# EAGLE board Multinutzen (EAGLE 4.16)
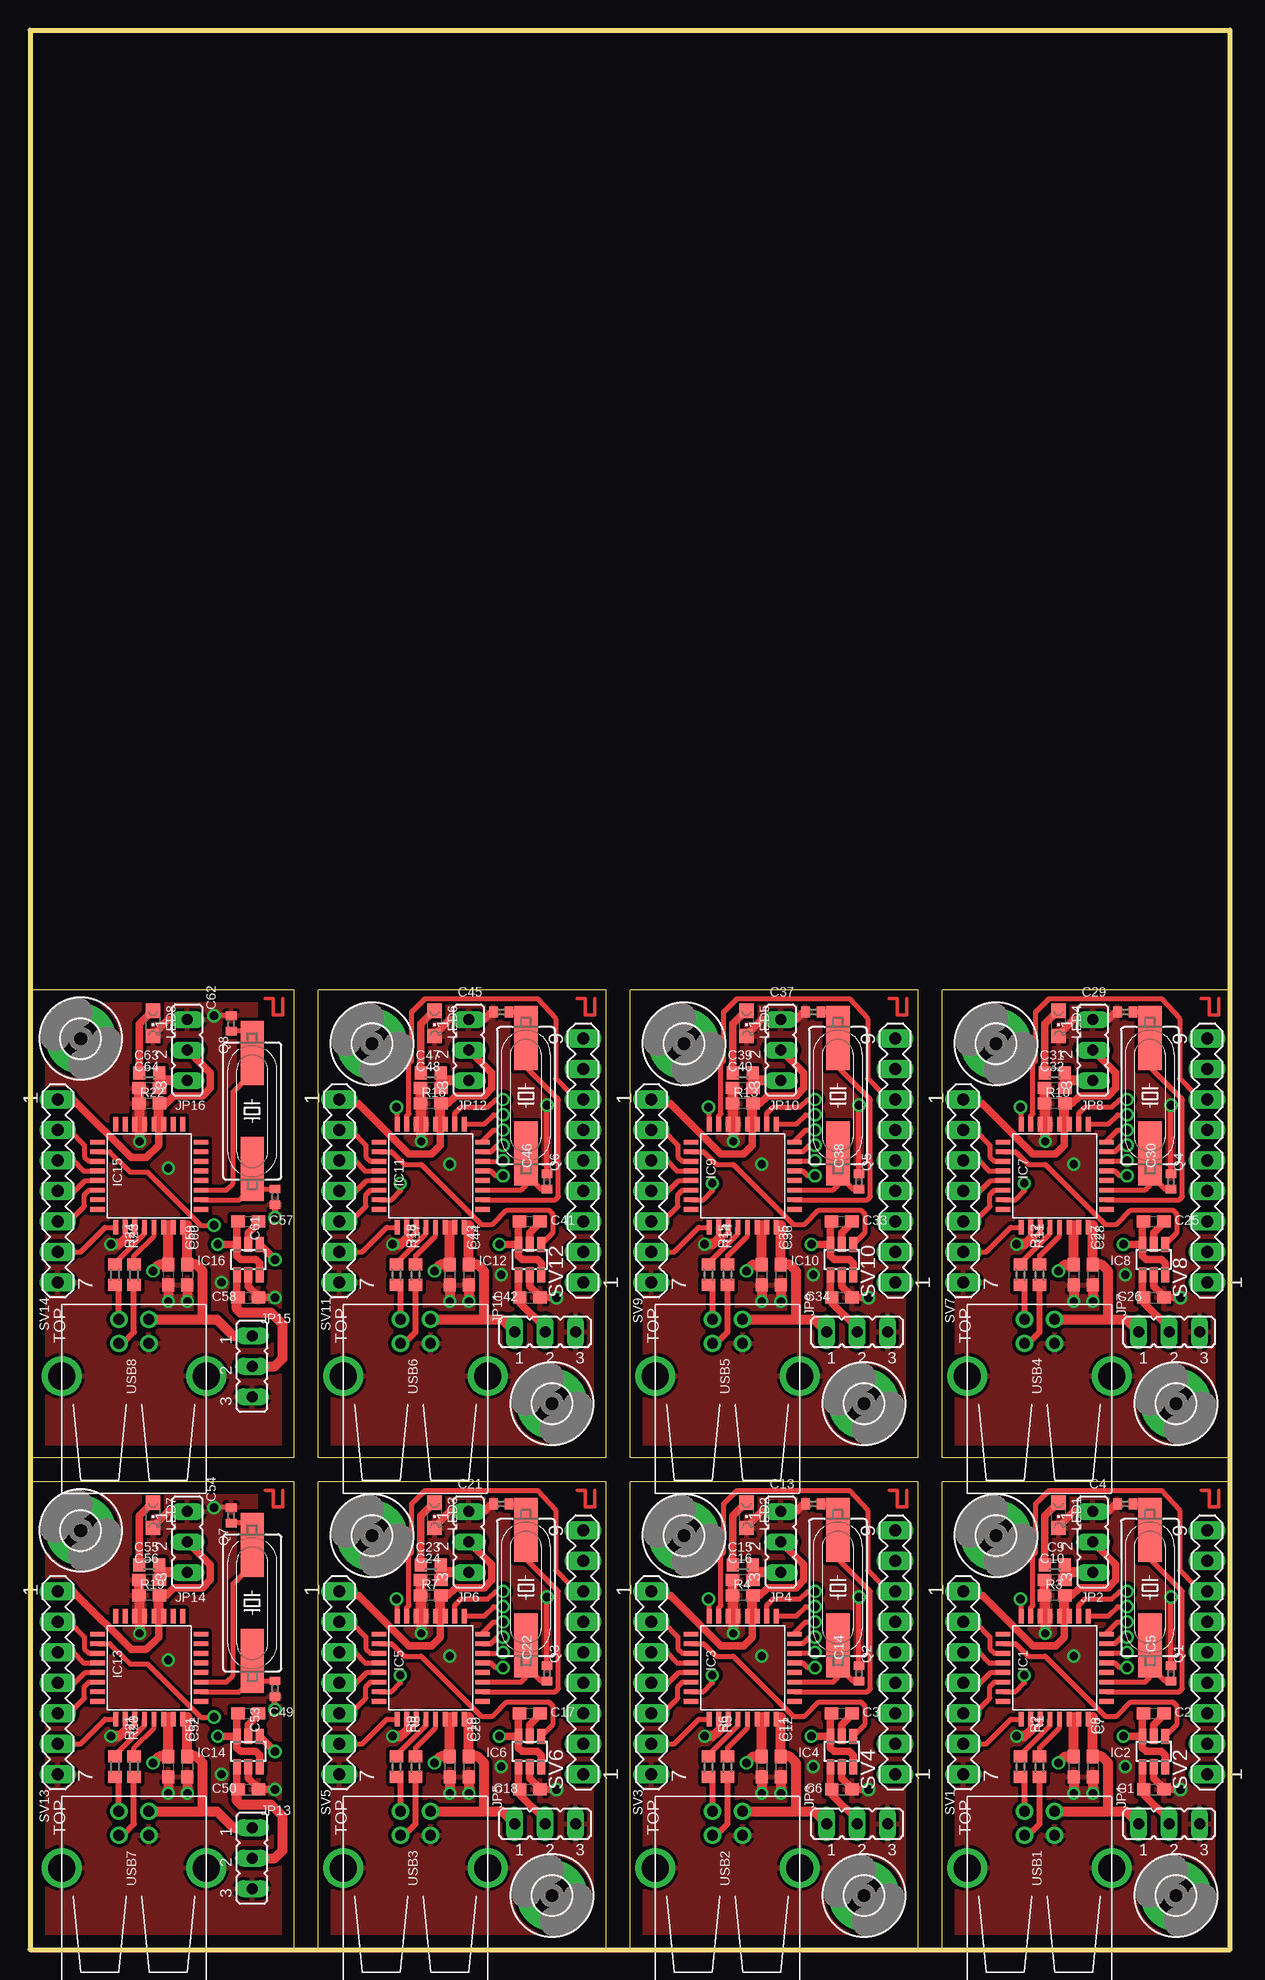
[diagram p0: board, top side]
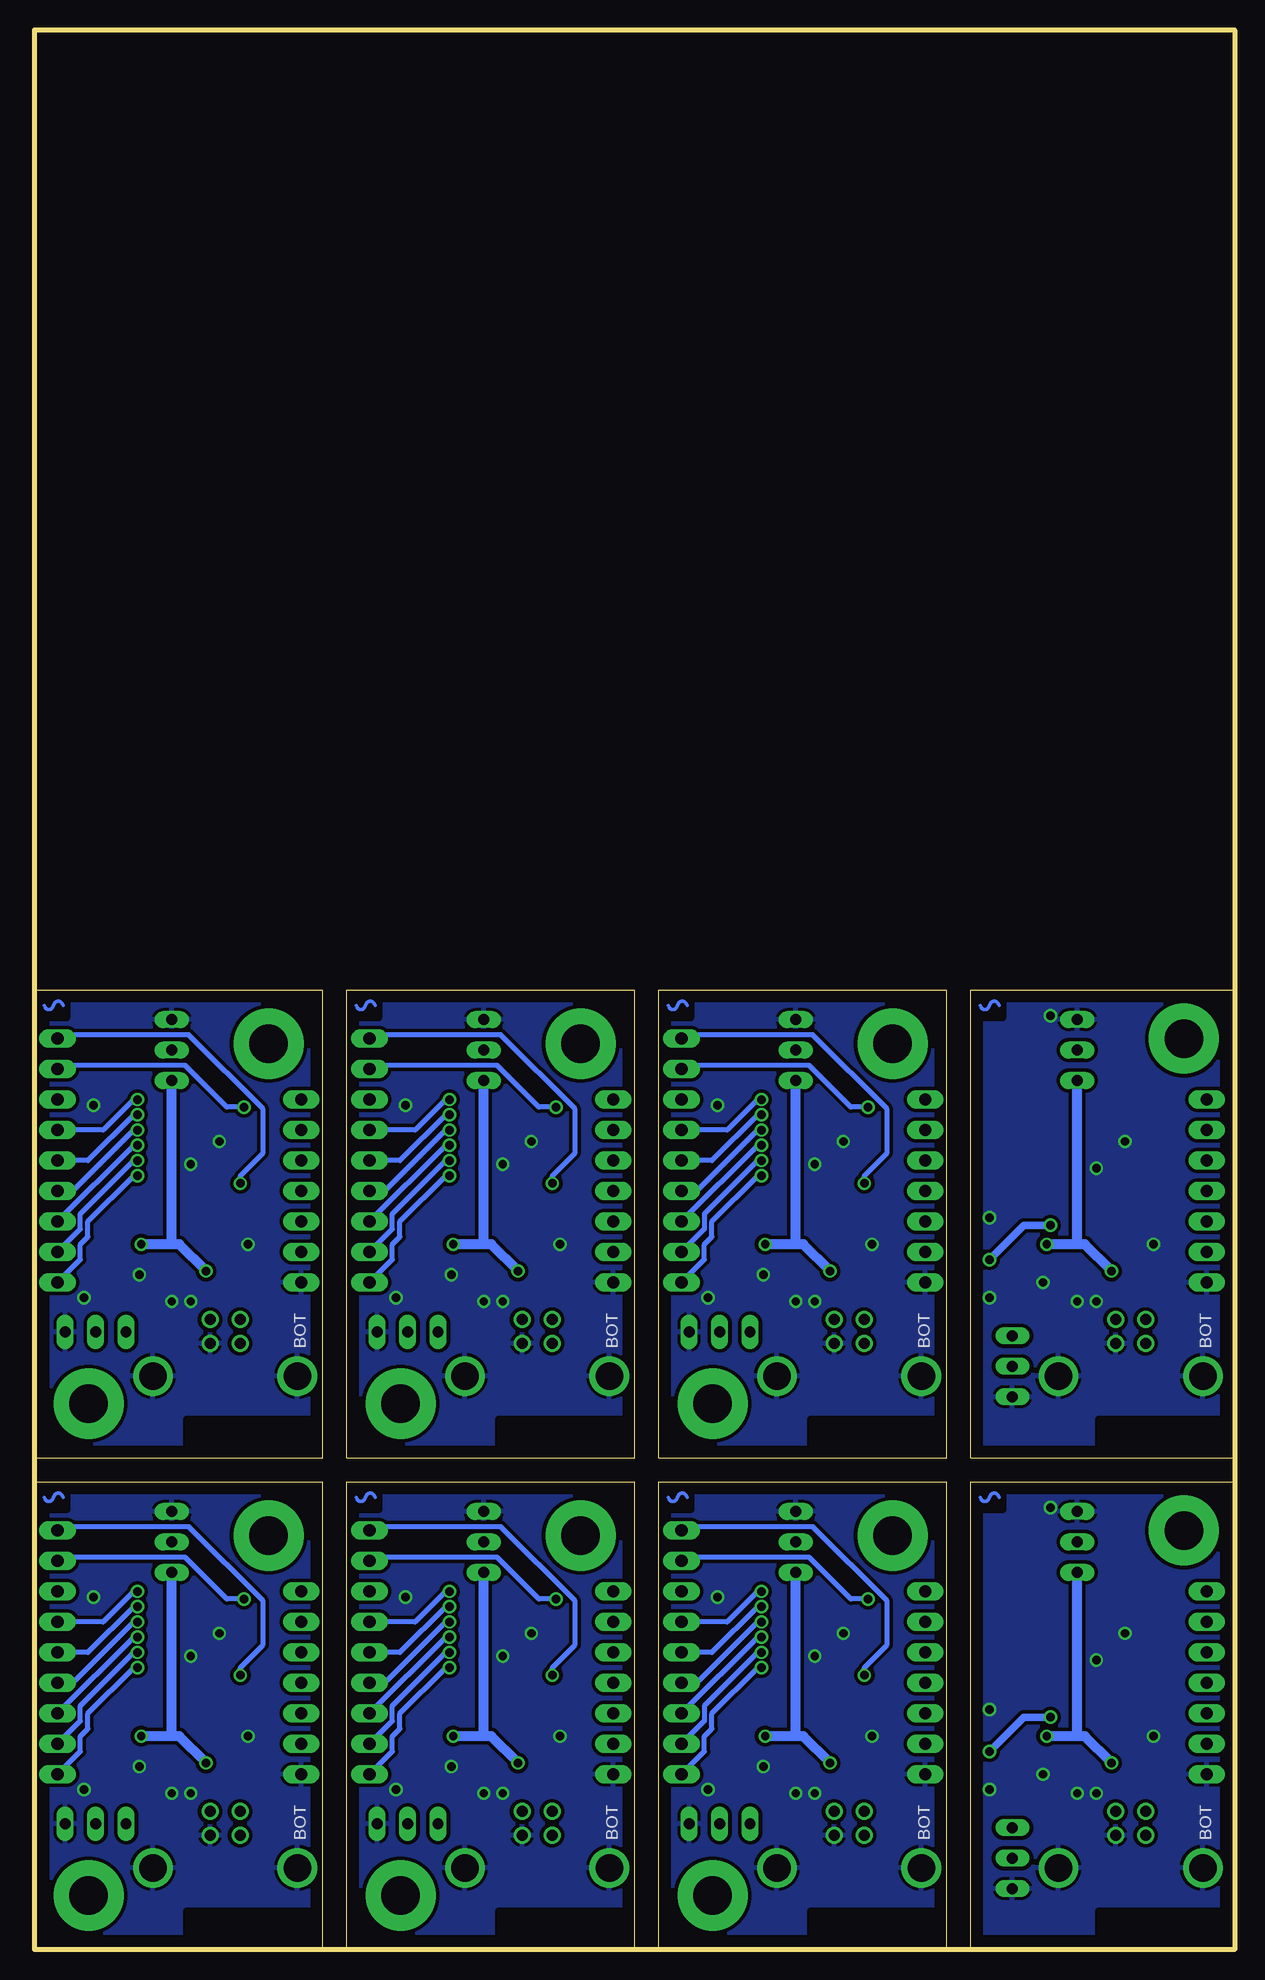
[diagram p1: board, bottom side, seen from below]

Size 100 x 160 mm. Coordinates in mm from the lower left corner, seen from the top.
Outline: 100,0 0,0 0,160 100,160 100,0
Outline: 100,0 100,39 76,39 76,0 100,0
Outline: 74,0 74,39 50,39 50,0 74,0
Outline: 48,0 48,39 24,39 24,0 48,0
Outline: 100,41 100,80 76,80 76,41 100,41
Outline: 74,41 74,80 50,80 50,41 74,41
Outline: 48,41 48,80 24,80 24,41 48,41
Outline: 22,0 22,39 0.04,39 0.04,0 22,0
Outline: 22,41 22,80 0.04,80 0.04,41 22,41
Copper layers (1*16): Top 0.035mm / dielectric 1.5mm / Bottom 0.035mm
Design rules "default": minimum track width 10mil, minimum drill 24mil, track to track 8mil, track to pad 8mil, pad to pad 8mil, via to via 8mil, smd to smd 8mil, copper to edge 40mil, drill to drill 8mil, minimum pad ring 10mil, minimum via ring 8mil, stop-mask expansion 4mil, vias tented up to drill 0mil, thermal gap 10mil
Net classes: 1 power: width 0.61 mm
tRestrict: area 97.3,36.7 to 99.5,38.7; area 71.3,36.7 to 73.5,38.7; area 45.3,36.7 to 47.5,38.7; area 97.3,77.7 to 99.5,79.7; area 71.3,77.7 to 73.5,79.7; area 45.3,77.7 to 47.5,79.7; area 19.3,36.7 to 21.5,38.7; area 19.3,77.7 to 21.5,79.7
bRestrict: area 86.5,2.7 to 86.8,2.8; area 85,2.7 to 86,2.8; area 86.5,2.7 to 86.8,2.7; area 85,2.7 to 86,2.7; area 86.5,2.6 to 86.8,2.7; area 85,2.6 to 86,2.7; area 86.5,2.6 to 86.8,2.6; area 85,2.6 to 86,2.6; area 86.5,2.6 to 86.8,2.6; area 85,2.6 to 86,2.6; area 86.5,2.5 to 86.8,2.6; area 85,2.5 to 86,2.6; 796 more areas
Milling: 32 lines

## Footprints (pad centres in the part's own frame; a part is rotated, then mirrored left to right if it is on the bottom)
C0603 = smd 1.1 x 1: 1 -0.85,0; 2 0.85,0
C0402 = smd 0.7 x 0.9: 1 -0.65,0; 2 0.65,0
3,2-PAD = drill 3.2 pad 5.842 round: B3,2 0,0
LQFP32 = smd 0.4 x 1.2: 1 -2.8,-4.3; 2 -2,-4.3; 3 -1.2,-4.3; 4 -0.4,-4.3; 5 0.4,-4.3; 6 1.2,-4.3; 7 2,-4.3; 8 2.8,-4.3; 17 2.8,4.3; 18 2,4.3; 19 1.2,4.3; 20 0.4,4.3; 21 -0.4,4.3; 22 -1.2,4.3; 23 -2,4.3; 24 -2.8,4.3 | smd 1.2 x 0.4: 9 4.3,-2.8; 10 4.3,-2; 11 4.3,-1.2; 12 4.3,-0.4; 13 4.3,0.4; 14 4.3,1.2; 15 4.3,2; 16 4.3,2.8; 25 -4.3,2.8; 26 -4.3,2; 27 -4.3,1.2; 28 -4.3,0.4; 29 -4.3,-0.4; 30 -4.3,-1.2; 31 -4.3,-2; 32 -4.3,-2.8
SOT23-6 = smd 0.635 x 1.27: P$1 -0.953,-1.27; P$2 0,-1.27; P$3 0.953,-1.27; P$4 0.953,1.27; P$5 0,1.27; P$6 -0.953,1.27
JP2 = drill 0.914 long: 1 -2.54,0; 2 0,0; 3 2.54,0
CHIPLED_0805 = smd 1.2 x 1.2: A 0,-1.05; C 0,1.05
HC49UP = smd 5.334 x 1.93: 1 -4.826,0; 2 4.826,0
R0603 = smd 1 x 1.1: 1 -0.85,0; 2 0.85,0
MA07-1 = drill 1.016 long: 1 -7.62,0; 2 -5.08,0; 3 -2.54,0; 4 0,0; 5 2.54,0; 6 5.08,0; 7 7.62,0
MA09-1 = drill 1.016 long: 1 -10.16,0; 2 -7.62,0; 3 -5.08,0; 4 -2.54,0; 5 0,0; 6 2.54,0; 7 5.08,0; 8 7.62,0; 9 10.16,0
USB-B-H = drill 0.914 round: D+ 0,1.25; D- 1.981,1.25; GND 0,-1.25; VBUS 1.981,-1.25 | drill 2.286 round: GND@1 -2.718,6.02; GND@2 -2.718,-6.02

## Placement (x,y rotation side)
C1  2,2µ  [C0603]  93.65,13.34 0 top
C2  1µ  [C0603]  93.65,19.68 0 top
C3  1µ  [C0603]  67.65,19.68 0 top
C4  18p  [C0402]  91.27,37.15 180 top
C5  18p  [C0402]  95.08,23.02 90 top
C6  2,2µ  [C0603]  67.65,13.34 0 top
C7  2,2µ  [C0603]  88.57,15.24 270 top
C8  1µ  [C0603]  86.98,15.24 270 top
C9  2,2µ  [C0603]  85.39,30.8 180 top
C10  1µ  [C0603]  85.39,29.53 180 top
C11  1µ  [C0603]  60.98,15.24 270 top
C12  2,2µ  [C0603]  62.57,15.24 270 top
C13  18p  [C0402]  65.27,37.15 180 top
C14  18p  [C0402]  69.08,23.02 90 top
C15  2,2µ  [C0603]  59.4,30.8 180 top
C16  1µ  [C0603]  59.4,29.53 180 top
C17  1µ  [C0603]  41.65,19.68 0 top
C18  2,2µ  [C0603]  41.65,13.34 0 top
C19  1µ  [C0603]  34.98,15.24 270 top
C20  2,2µ  [C0603]  36.57,15.24 270 top
C21  18p  [C0402]  39.27,37.15 180 top
C22  18p  [C0402]  43.08,23.02 90 top
C23  2,2µ  [C0603]  33.4,30.8 180 top
C24  1µ  [C0603]  33.4,29.53 180 top
C25  1µ  [C0603]  93.65,60.69 0 top
C26  2,2µ  [C0603]  93.65,54.34 0 top
C27  1µ  [C0603]  86.98,56.24 270 top
C28  2,2µ  [C0603]  88.57,56.24 270 top
C29  18p  [C0402]  91.27,78.15 180 top
C30  18p  [C0402]  95.08,64.02 90 top
C31  2,2µ  [C0603]  85.39,71.8 180 top
C32  1µ  [C0603]  85.39,70.53 180 top
C33  1µ  [C0603]  67.65,60.69 0 top
C34  2,2µ  [C0603]  67.65,54.34 0 top
C35  1µ  [C0603]  60.98,56.24 270 top
C36  2,2µ  [C0603]  62.57,56.24 270 top
C37  18p  [C0402]  65.27,78.15 180 top
C38  18p  [C0402]  69.08,64.02 90 top
C39  2,2µ  [C0603]  59.4,71.8 180 top
C40  1µ  [C0603]  59.4,70.53 180 top
C41  1µ  [C0603]  41.65,60.69 0 top
C42  2,2µ  [C0603]  41.65,54.34 0 top
C43  1µ  [C0603]  34.98,56.24 270 top
C44  2,2µ  [C0603]  36.57,56.24 270 top
C45  18p  [C0402]  39.27,78.15 180 top
C46  18p  [C0402]  43.08,64.02 90 top
C47  2,2µ  [C0603]  33.4,71.8 180 top
C48  1µ  [C0603]  33.4,70.53 180 top
C49  1µ  [C0603]  18.19,19.68 0 top
C50  2,2µ  [C0603]  18.19,13.34 0 top
C51  1µ  [C0603]  11.52,15.24 270 top
C52  2,2µ  [C0603]  13.11,15.24 270 top
C53  18p  [C0402]  20.41,21.75 270 top
C54  18p  [C0402]  16.76,36.19 90 top
C55  2,2µ  [C0603]  9.94,30.8 180 top
C56  1µ  [C0603]  9.94,29.53 180 top
C57  1µ  [C0603]  18.19,60.69 0 top
C58  2,2µ  [C0603]  18.19,54.34 0 top
C59  1µ  [C0603]  11.52,56.24 270 top
C60  2,2µ  [C0603]  13.11,56.24 270 top
C61  18p  [C0402]  20.41,62.75 270 top
C62  18p  [C0402]  16.76,77.19 90 top
C63  2,2µ  [C0603]  9.94,71.8 180 top
C64  1µ  [C0603]  9.94,70.53 180 top
H1  MOUNT-PAD-ROUND3.2  [3,2-PAD]  95.5,4.5 90 top
H2  MOUNT-PAD-ROUND3.2  [3,2-PAD]  80.5,34.5 90 top
H3  MOUNT-PAD-ROUND3.2  [3,2-PAD]  69.5,4.5 90 top
H4  MOUNT-PAD-ROUND3.2  [3,2-PAD]  54.5,34.5 90 top
H5  MOUNT-PAD-ROUND3.2  [3,2-PAD]  43.5,4.5 90 top
H6  MOUNT-PAD-ROUND3.2  [3,2-PAD]  28.5,34.5 90 top
H7  MOUNT-PAD-ROUND3.2  [3,2-PAD]  95.5,45.5 90 top
H8  MOUNT-PAD-ROUND3.2  [3,2-PAD]  80.5,75.5 90 top
H9  MOUNT-PAD-ROUND3.2  [3,2-PAD]  69.5,45.5 90 top
H10  MOUNT-PAD-ROUND3.2  [3,2-PAD]  54.5,75.5 90 top
H11  MOUNT-PAD-ROUND3.2  [3,2-PAD]  43.5,45.5 90 top
H12  MOUNT-PAD-ROUND3.2  [3,2-PAD]  28.5,75.5 90 top
H13  MOUNT-PAD-ROUND3.2  [3,2-PAD]  4.22,34.92 90 top
H14  MOUNT-PAD-ROUND3.2  [3,2-PAD]  4.22,75.92 90 top
IC1  MAX3420E  [LQFP32]  85.39,23.5 180 top
IC2  MAX6349  [SOT23-6]  93.65,16.51 0 top
IC3  MAX3420E  [LQFP32]  59.4,23.5 180 top
IC4  MAX6349  [SOT23-6]  67.65,16.51 0 top
IC5  MAX3420E  [LQFP32]  33.4,23.5 180 top
IC6  MAX6349  [SOT23-6]  41.65,16.51 0 top
IC7  MAX3420E  [LQFP32]  85.39,64.5 180 top
IC8  MAX6349  [SOT23-6]  93.65,57.51 0 top
IC9  MAX3420E  [LQFP32]  59.4,64.5 180 top
IC10  MAX6349  [SOT23-6]  67.65,57.51 0 top
IC11  MAX3420E  [LQFP32]  33.4,64.5 180 top
IC12  MAX6349  [SOT23-6]  41.65,57.51 0 top
IC13  MAX3420E  [LQFP32]  9.94,23.5 180 top
IC14  MAX6349  [SOT23-6]  18.19,16.51 0 top
IC15  MAX3420E  [LQFP32]  9.94,64.5 180 top
IC16  MAX6349  [SOT23-6]  18.19,57.51 0 top
JP1  [JP2]  94.92,10.48 0 top
JP2  [JP2]  88.57,33.97 270 top
JP3  [JP2]  68.92,10.48 0 top
JP4  [JP2]  62.57,33.97 270 top
JP5  [JP2]  42.92,10.48 0 top
JP6  [JP2]  36.57,33.97 270 top
JP7  [JP2]  94.92,51.48 0 top
JP8  [JP2]  88.57,74.97 270 top
JP9  [JP2]  68.92,51.48 0 top
JP10  [JP2]  62.57,74.97 270 top
JP11  [JP2]  42.92,51.48 0 top
JP12  [JP2]  36.57,74.97 270 top
JP13  [JP2]  18.51,7.62 270 top
JP14  [JP2]  13.11,33.97 270 top
JP15  [JP2]  18.51,48.62 270 top
JP16  [JP2]  13.11,74.97 270 top
LED1  [CHIPLED_0805]  85.71,36.2 180 top
LED2  [CHIPLED_0805]  59.71,36.2 180 top
LED3  [CHIPLED_0805]  33.71,36.2 180 top
LED4  [CHIPLED_0805]  85.71,77.19 180 top
LED5  [CHIPLED_0805]  59.71,77.19 180 top
LED6  [CHIPLED_0805]  33.71,77.19 180 top
LED7  [CHIPLED_0805]  10.25,36.2 180 top
LED8  [CHIPLED_0805]  10.25,77.19 180 top
Q1  12MHz  [HC49UP]  93.33,30.16 90 top
Q2  12MHz  [HC49UP]  67.33,30.16 90 top
Q3  12MHz  [HC49UP]  41.33,30.16 90 top
Q4  12MHz  [HC49UP]  93.33,71.16 90 top
Q5  12MHz  [HC49UP]  67.33,71.16 90 top
Q6  12MHz  [HC49UP]  41.33,71.16 90 top
Q7  12MHz  [HC49UP]  18.51,28.89 270 top
Q8  12MHz  [HC49UP]  18.51,69.89 270 top
R1  33,2 1%  [R0603]  84.12,15.24 90 top
R2  33,2 1%  [R0603]  82.54,15.24 90 top
R3  150  [R0603]  85.39,32.07 0 top
R4  150  [R0603]  59.4,32.07 0 top
R5  33,2 1%  [R0603]  58.12,15.24 90 top
R6  33,2 1%  [R0603]  56.54,15.24 90 top
R7  150  [R0603]  33.4,32.07 0 top
R8  33,2 1%  [R0603]  32.12,15.24 90 top
R9  33,2 1%  [R0603]  30.54,15.24 90 top
R10  150  [R0603]  85.39,73.07 0 top
R11  33,2 1%  [R0603]  84.12,56.24 90 top
R12  33,2 1%  [R0603]  82.54,56.24 90 top
R13  150  [R0603]  59.4,73.07 0 top
R14  33,2 1%  [R0603]  58.12,56.24 90 top
R15  33,2 1%  [R0603]  56.54,56.24 90 top
R16  150  [R0603]  33.4,73.07 0 top
R17  33,2 1%  [R0603]  32.12,56.24 90 top
R18  33,2 1%  [R0603]  30.54,56.24 90 top
R19  150  [R0603]  9.94,32.07 0 top
R20  33,2 1%  [R0603]  8.66,15.24 90 top
R21  33,2 1%  [R0603]  7.08,15.24 90 top
R22  150  [R0603]  9.94,73.07 0 top
R23  33,2 1%  [R0603]  8.66,56.24 90 top
R24  33,2 1%  [R0603]  7.08,56.24 90 top
SV1  [MA07-1]  77.78,22.23 270 top
SV2  [MA09-1]  98.09,24.77 90 top
SV3  [MA07-1]  51.77,22.23 270 top
SV4  [MA09-1]  72.09,24.77 90 top
SV5  [MA07-1]  25.77,22.23 270 top
SV6  [MA09-1]  46.09,24.77 90 top
SV7  [MA07-1]  77.78,63.23 270 top
SV8  [MA09-1]  98.09,65.77 90 top
SV9  [MA07-1]  51.77,63.23 270 top
SV10  [MA09-1]  72.09,65.77 90 top
SV11  [MA07-1]  25.77,63.23 270 top
SV12  [MA09-1]  46.09,65.77 90 top
SV13  [MA07-1]  2.31,22.23 270 top
SV14  [MA07-1]  2.31,63.23 270 top
USB1  USB-B-H  [USB-B-H]  84.12,9.53 90 top
USB2  USB-B-H  [USB-B-H]  58.12,9.53 90 top
USB3  USB-B-H  [USB-B-H]  32.12,9.53 90 top
USB4  USB-B-H  [USB-B-H]  84.12,50.52 90 top
USB5  USB-B-H  [USB-B-H]  58.12,50.52 90 top
USB6  USB-B-H  [USB-B-H]  32.12,50.52 90 top
USB7  USB-B-H  [USB-B-H]  8.66,9.53 90 top
USB8  USB-B-H  [USB-B-H]  8.66,50.52 90 top

## Library data of the parts
C1-C64 R1-R24 = rcl
H1-H14 = holes
IC1-IC16 = MAXIM
JP1-JP16 = jumper
LED1-LED8 = led
Q1-Q8 = crystal
SV1-SV14 = con-lstb
USB1-USB8 = con-usb-2

## Nets
+3V1: C3.1 C11.1 C15.1 IC3.22 IC3.23 IC4.P$3 IC4.P$6 JP4.3 R4.2
+3V2: C17.1 C19.1 C23.1 IC5.22 IC5.23 IC6.P$3 IC6.P$6 JP6.3 R7.2
+3V3: C2.1 C8.1 C9.1 IC1.22 IC1.23 IC2.P$3 IC2.P$6 JP2.3 R3.2
+3V4: C25.1 C27.1 C31.1 IC7.22 IC7.23 IC8.P$3 IC8.P$6 JP8.3 R10.2
+3V5: C33.1 C35.1 C39.1 IC9.22 IC9.23 IC10.P$3 IC10.P$6 JP10.3 R13.2
+3V6: C41.1 C43.1 C47.1 IC11.22 IC11.23 IC12.P$3 IC12.P$6 JP12.3 R16.2
+3V7: C49.1 C51.1 C55.1 IC13.22 IC13.23 IC14.P$3 IC14.P$6 JP14.3 R19.2
+3V8: C57.1 C59.1 C63.1 IC15.22 IC15.23 IC16.P$3 IC16.P$6 JP16.3 R22.2
/CS: IC1.12 SV1.3
/CS1: IC3.12 SV3.3
/CS2: IC5.12 SV5.3
/CS3: IC7.12 SV7.3
/CS4: IC9.12 SV9.3
/CS5: IC11.12 SV11.3
/CS6: IC13.12 SV13.3
/CS7: IC15.12 SV14.3
/RES: IC1.10 IC2.P$4
/RES1: IC3.10 IC4.P$4
/RES2: IC5.10 IC6.P$4
/RES3: IC7.10 IC8.P$4
/RES4: IC9.10 IC10.P$4
/RES5: IC11.10 IC12.P$4
/RES6: IC13.10 IC14.P$4
/RES7: IC15.10 IC16.P$4
GND: C1.2 C4.2 C5.2 C7.2 C8.2 C9.2 C10.2 IC1.5 IC1.6 IC1.18 IC1.19 IC2.P$2 JP1.3 JP2.1 LED1.C SV1.7 USB1.GND USB1.GND@1 USB1.GND@2
GND1: C6.2 C11.2 C12.2 C13.2 C14.2 C15.2 C16.2 IC3.5 IC3.6 IC3.18 IC3.19 IC4.P$2 JP3.3 JP4.1 LED2.C SV3.7 USB2.GND USB2.GND@1 USB2.GND@2
GND2: C18.2 C19.2 C20.2 C21.2 C22.2 C23.2 C24.2 IC5.5 IC5.6 IC5.18 IC5.19 IC6.P$2 JP5.3 JP6.1 LED3.C SV5.7 USB3.GND USB3.GND@1 USB3.GND@2
GND3: C26.2 C27.2 C28.2 C29.2 C30.2 C31.2 C32.2 IC7.5 IC7.6 IC7.18 IC7.19 IC8.P$2 JP7.3 JP8.1 LED4.C SV7.7 USB4.GND USB4.GND@1 USB4.GND@2
GND4: C34.2 C35.2 C36.2 C37.2 C38.2 C39.2 C40.2 IC9.5 IC9.6 IC9.18 IC9.19 IC10.P$2 JP9.3 JP10.1 LED5.C SV9.7 USB5.GND USB5.GND@1 USB5.GND@2
GND5: C42.2 C43.2 C44.2 C45.2 C46.2 C47.2 C48.2 IC11.5 IC11.6 IC11.18 IC11.19 IC12.P$2 JP11.3 JP12.1 LED6.C SV11.7 USB6.GND USB6.GND@1 USB6.GND@2
GND6: C50.2 C51.2 C52.2 C53.2 C54.2 C55.2 C56.2 IC13.5 IC13.6 IC13.18 IC13.19 IC14.P$2 JP13.3 JP14.1 LED7.C SV13.7 USB7.GND USB7.GND@1 USB7.GND@2
GND7: C58.2 C59.2 C60.2 C61.2 C62.2 C63.2 C64.2 IC15.5 IC15.6 IC15.18 IC15.19 IC16.P$2 JP15.3 JP16.1 LED8.C SV14.7 USB8.GND USB8.GND@1 USB8.GND@2
GPI0: IC1.29 SV2.1
GPI1: IC1.30 SV2.2
GPI2: IC1.31 SV2.3
GPI3: IC1.32 SV2.4
GPI4: IC3.29 SV4.1
GPI5: IC3.30 SV4.2
GPI6: IC3.31 SV4.3
GPI7: IC3.32 SV4.4
GPI8: IC5.29 SV6.1
GPI9: IC5.30 SV6.2
GPI10: IC5.31 SV6.3
GPI11: IC5.32 SV6.4
GPI12: IC7.29 SV8.1
GPI13: IC7.30 SV8.2
GPI14: IC7.31 SV8.3
GPI15: IC7.32 SV8.4
GPI16: IC9.29 SV10.1
GPI17: IC9.30 SV10.2
GPI18: IC9.31 SV10.3
GPI19: IC9.32 SV10.4
GPI20: IC11.29 SV12.1
GPI21: IC11.30 SV12.2
GPI22: IC11.31 SV12.3
GPI23: IC11.32 SV12.4
GPI24: IC13.29
GPI25: IC13.30
GPI26: IC13.31
GPI27: IC13.32
GPI28: IC15.29
GPI29: IC15.30
GPI30: IC15.31
GPI31: IC15.32
GPO0: IC1.1 SV2.5
GPO1: IC1.2 SV2.6
GPO2: IC1.7 SV2.7
GPO3: IC1.8 SV2.8
GPO4: IC3.1 SV4.5
GPO5: IC3.2 SV4.6
GPO6: IC3.7 SV4.7
GPO7: IC3.8 SV4.8
GPO8: IC5.1 SV6.5
GPO9: IC5.2 SV6.6
GPO10: IC5.7 SV6.7
GPO11: IC5.8 SV6.8
GPO12: IC7.1 SV8.5
GPO13: IC7.2 SV8.6
GPO14: IC7.7 SV8.7
GPO15: IC7.8 SV8.8
GPO16: IC9.1 SV10.5
GPO17: IC9.2 SV10.6
GPO18: IC9.7 SV10.7
GPO19: IC9.8 SV10.8
GPO20: IC11.1 SV12.5
GPO21: IC11.2 SV12.6
GPO22: IC11.7 SV12.7
GPO23: IC11.8 SV12.8
GPO24: IC13.1
GPO25: IC13.2
GPO26: IC13.7
GPO27: IC13.8
GPO28: IC15.1
GPO29: IC15.2
GPO30: IC15.7
GPO31: IC15.8
GPX: IC1.15 SV2.9
GPX1: IC3.15 SV4.9
GPX2: IC5.15 SV6.9
GPX3: IC7.15 SV8.9
GPX4: IC9.15 SV10.9
GPX5: IC11.15 SV12.9
GPX6: IC13.15
GPX7: IC15.15
INT: IC1.17 SV1.6
INT1: IC3.17 SV3.6
INT2: IC5.17 SV5.6
INT3: IC7.17 SV7.6
INT4: IC9.17 SV9.6
INT5: IC11.17 SV11.6
INT6: IC13.17 SV13.6
INT7: IC15.17 SV14.6
MISO: IC1.13 SV1.4
MISO1: IC3.13 SV3.4
MISO2: IC5.13 SV5.4
MISO3: IC7.13 SV7.4
MISO4: IC9.13 SV9.4
MISO5: IC11.13 SV11.4
MISO6: IC13.13 SV13.4
MISO7: IC15.13 SV14.4
MOSI: IC1.14 SV1.5
MOSI1: IC3.14 SV3.5
MOSI2: IC5.14 SV5.5
MOSI3: IC7.14 SV7.5
MOSI4: IC9.14 SV9.5
MOSI5: IC11.14 SV11.5
MOSI6: IC13.14 SV13.5
MOSI7: IC15.14 SV14.5
N$1: C2.2 IC2.P$5
N$2: C3.2 IC4.P$5
N$3: C1.1 IC2.P$1 JP1.2
N$4: IC1.20 R2.2
N$5: C6.1 IC4.P$1 JP3.2
N$6: LED1.A R3.1
N$7: R2.1 USB1.D-
N$8: IC1.21 R1.2
N$9: R1.1 USB1.D+
N$11: C5.1 IC1.27 Q1.1
N$12: C4.1 IC1.26 Q1.2
N$14: LED2.A R4.1
N$15: IC3.20 R6.2
N$16: R6.1 USB2.D-
N$17: IC3.21 R5.2
N$18: R5.1 USB2.D+
N$19: C14.1 IC3.27 Q2.1
N$20: C13.1 IC3.26 Q2.2
N$23: C17.2 IC6.P$5
N$24: C18.1 IC6.P$1 JP5.2
N$25: LED3.A R7.1
N$26: IC5.20 R9.2
N$27: R9.1 USB3.D-
N$28: IC5.21 R8.2
N$29: R8.1 USB3.D+
N$30: C22.1 IC5.27 Q3.1
N$31: C21.1 IC5.26 Q3.2
N$34: C25.2 IC8.P$5
N$35: C26.1 IC8.P$1 JP7.2
N$36: LED4.A R10.1
N$37: IC7.20 R12.2
N$38: R12.1 USB4.D-
N$39: IC7.21 R11.2
N$40: R11.1 USB4.D+
N$41: C30.1 IC7.27 Q4.1
N$42: C29.1 IC7.26 Q4.2
N$45: C33.2 IC10.P$5
N$46: C34.1 IC10.P$1 JP9.2
N$47: LED5.A R13.1
N$48: IC9.20 R15.2
N$49: R15.1 USB5.D-
N$50: IC9.21 R14.2
N$51: R14.1 USB5.D+
N$52: C38.1 IC9.27 Q5.1
N$53: C37.1 IC9.26 Q5.2
N$56: C41.2 IC12.P$5
N$57: C42.1 IC12.P$1 JP11.2
N$58: LED6.A R16.1
N$59: IC11.20 R18.2
N$60: R18.1 USB6.D-
N$61: IC11.21 R17.2
N$62: R17.1 USB6.D+
N$63: C46.1 IC11.27 Q6.1
N$64: C45.1 IC11.26 Q6.2
N$67: C49.2 IC14.P$5
N$68: C50.1 IC14.P$1 JP13.2
N$69: LED7.A R19.1
N$70: IC13.20 R21.2
N$71: R21.1 USB7.D-
N$72: IC13.21 R20.2
N$73: R20.1 USB7.D+
N$74: C54.1 IC13.27 Q7.1
N$75: C53.1 IC13.26 Q7.2
N$78: C57.2 IC16.P$5
N$79: C58.1 IC16.P$1 JP15.2
N$80: LED8.A R22.1
N$81: IC15.20 R24.2
N$82: R24.1 USB8.D-
N$83: IC15.21 R23.2
N$84: R23.1 USB8.D+
N$85: C62.1 IC15.27 Q8.1
N$86: C61.1 IC15.26 Q8.2
SCLK: IC1.11 SV1.2
SCLK1: IC3.11 SV3.2
SCLK2: IC5.11 SV5.2
SCLK3: IC7.11 SV7.2
SCLK4: IC9.11 SV9.2
SCLK5: IC11.11 SV11.2
SCLK6: IC13.11 SV13.2
SCLK7: IC15.11 SV14.2
VBUS: C7.1 IC1.24 JP1.1 USB1.VBUS
VBUS1: C12.1 IC3.24 JP3.1 USB2.VBUS
VBUS2: C20.1 IC5.24 JP5.1 USB3.VBUS
VBUS3: C28.1 IC7.24 JP7.1 USB4.VBUS
VBUS4: C36.1 IC9.24 JP9.1 USB5.VBUS
VBUS5: C44.1 IC11.24 JP11.1 USB6.VBUS
VBUS6: C52.1 IC13.24 JP13.1 USB7.VBUS
VBUS7: C60.1 IC15.24 JP15.1 USB8.VBUS
VL [power]: C10.1 IC1.3 IC1.4 JP2.2 SV1.1
VL1 [power]: C16.1 IC3.3 IC3.4 JP4.2 SV3.1
VL2 [power]: C24.1 IC5.3 IC5.4 JP6.2 SV5.1
VL3 [power]: C32.1 IC7.3 IC7.4 JP8.2 SV7.1
VL4 [power]: C40.1 IC9.3 IC9.4 JP10.2 SV9.1
VL5 [power]: C48.1 IC11.3 IC11.4 JP12.2 SV11.1
VL6 [power]: C56.1 IC13.3 IC13.4 JP14.2 SV13.1
VL7 [power]: C64.1 IC15.3 IC15.4 JP16.2 SV14.1

## Tracks (layer width: path | path; a pad name or v marks a point on that pad's centre or on a via)
+3V1  (via drill 0.7)
  Top 0.406: IC3.23 61.16,19.2 60.98,19.37 60.81,19.2 IC3.22
  Top 0.61: C3.1 66.7,19.68 IC4.P$6 | IC4.P$3 68.6,16.19 68.28,16.51 67.02,16.51 66.7,16.83 IC4.P$6 | v65.11,17.78 IC4.P$6
  Top 0.813: C15.1 60.19,30.8 60.24,30.85 60.24,31.43 | 60.24,31.43 R4.2 | C11.1 60.24,16.09 v59.71,15.56 | C11.1 60.98,16.03 | C11.1 60.98,19.37 | JP4.3 60.24,31.43
  Bottom 0.813: 62.57,17.78 v65.11,17.78 | 62.57,17.78 61.94,17.78 v59.71,15.56 | 62.57,17.78 JP4.3
+3V2  (via drill 0.7)
  Top 0.406: IC5.23 35.16,19.2 34.98,19.37 34.81,19.2 IC5.22
  Top 0.61: C17.1 40.7,19.68 IC6.P$6 | IC6.P$3 42.6,16.19 42.28,16.51 41.02,16.51 40.7,16.83 IC6.P$6 | v39.11,17.78 IC6.P$6
  Top 0.813: C23.1 34.19,30.8 34.24,30.85 34.24,31.43 | 34.24,31.43 R7.2 | C19.1 34.24,16.09 v33.71,15.56 | C19.1 34.98,16.03 | C19.1 34.98,19.37 | JP6.3 34.24,31.43
  Bottom 0.813: 36.57,17.78 v39.11,17.78 | 36.57,17.78 35.94,17.78 v33.71,15.56 | 36.57,17.78 JP6.3
+3V3  (via drill 0.7)
  Top 0.406: IC1.23 87.16,19.2 86.98,19.37 86.81,19.2 IC1.22
  Top 0.61: C2.1 92.7,19.68 IC2.P$6 | IC2.P$3 94.6,16.19 94.28,16.51 93.02,16.51 92.7,16.83 IC2.P$6 | v91.11,17.78 IC2.P$6
  Top 0.813: C9.1 86.19,30.8 86.25,30.85 86.25,31.43 | 86.25,31.43 R3.2 | C8.1 86.25,16.09 v85.71,15.56 | C8.1 86.98,16.03 | C8.1 86.98,19.37 | JP2.3 86.25,31.43
  Bottom 0.813: 88.57,17.78 v91.11,17.78 | 88.57,17.78 87.94,17.78 v85.71,15.56 | 88.57,17.78 JP2.3
+3V4  (via drill 0.7)
  Top 0.406: IC7.23 87.16,60.2 86.98,60.37 86.81,60.2 IC7.22
  Top 0.61: C25.1 92.7,60.69 IC8.P$6 | IC8.P$3 94.6,57.19 94.28,57.51 93.02,57.51 92.7,57.83 IC8.P$6 | v91.11,58.78 IC8.P$6
  Top 0.813: C31.1 86.19,71.8 86.25,71.85 86.25,72.43 | 86.25,72.43 R10.2 | C27.1 86.25,57.09 v85.71,56.56 | C27.1 86.98,57.03 | C27.1 86.98,60.37 | JP8.3 86.25,72.43
  Bottom 0.813: 88.57,58.78 v91.11,58.78 | 88.57,58.78 87.94,58.78 v85.71,56.56 | 88.57,58.78 JP8.3
+3V5  (via drill 0.7)
  Top 0.406: IC9.23 61.16,60.2 60.98,60.37 60.81,60.2 IC9.22
  Top 0.61: C33.1 66.7,60.69 IC10.P$6 | IC10.P$3 68.6,57.19 68.28,57.51 67.02,57.51 66.7,57.83 IC10.P$6 | v65.11,58.78 IC10.P$6
  Top 0.813: C39.1 60.19,71.8 60.24,71.85 60.24,72.43 | 60.24,72.43 R13.2 | C35.1 60.24,57.09 v59.71,56.56 | C35.1 60.98,57.03 | C35.1 60.98,60.37 | JP10.3 60.24,72.43
  Bottom 0.813: 62.57,58.78 v65.11,58.78 | 62.57,58.78 61.94,58.78 v59.71,56.56 | 62.57,58.78 JP10.3
+3V6  (via drill 0.7)
  Top 0.406: IC11.23 35.16,60.2 34.98,60.37 34.81,60.2 IC11.22
  Top 0.61: C41.1 40.7,60.69 IC12.P$6 | IC12.P$3 42.6,57.19 42.28,57.51 41.02,57.51 40.7,57.83 IC12.P$6 | v39.11,58.78 IC12.P$6
  Top 0.813: C47.1 34.19,71.8 34.24,71.85 34.24,72.43 | 34.24,72.43 R16.2 | C43.1 34.24,57.09 v33.71,56.56 | C43.1 34.98,57.03 | C43.1 34.98,60.37 | JP12.3 34.24,72.43
  Bottom 0.813: 36.57,58.78 v39.11,58.78 | 36.57,58.78 35.94,58.78 v33.71,56.56 | 36.57,58.78 JP12.3
+3V7  (via drill 0.7)
  Top 0.406: IC13.23 11.7,19.2 11.52,19.37 11.35,19.2 IC13.22
  Top 0.61: C49.1 17.24,19.68 IC14.P$6 | IC14.P$3 19.14,16.19 18.82,16.51 17.55,16.51 17.24,16.83 IC14.P$6 | v15.65,17.78 IC14.P$6
  Top 0.813: C55.1 10.73,30.8 10.79,30.85 10.79,31.43 | 10.79,31.43 R19.2 | C51.1 10.79,16.09 v10.25,15.56 | C51.1 11.52,16.03 | C51.1 11.52,19.37 | JP14.3 10.79,31.43
  Bottom 0.813: 13.11,17.78 v15.65,17.78 | 13.11,17.78 12.47,17.78 v10.25,15.56 | 13.11,17.78 JP14.3
+3V8  (via drill 0.7)
  Top 0.406: IC15.23 11.7,60.2 11.52,60.37 11.35,60.2 IC15.22
  Top 0.61: C57.1 17.24,60.69 IC16.P$6 | IC16.P$3 19.14,57.19 18.82,57.51 17.55,57.51 17.24,57.83 IC16.P$6 | v15.65,58.78 IC16.P$6
  Top 0.813: C63.1 10.73,71.8 10.79,71.85 10.79,72.43 | 10.79,72.43 R22.2 | C59.1 10.79,57.09 v10.25,56.56 | C59.1 11.52,57.03 | C59.1 11.52,60.37 | JP16.3 10.79,72.43
  Bottom 0.813: 13.11,58.78 v15.65,58.78 | 13.11,58.78 12.47,58.78 v10.25,56.56 | 13.11,58.78 JP16.3
/CS
  Top 0.406: IC1.12 79.92,23.89 79.05,24.77 SV1.3
/CS1
  Top 0.406: IC3.12 53.91,23.89 53.05,24.77 SV3.3
/CS2
  Top 0.406: IC5.12 27.91,23.89 27.05,24.77 SV5.3
/CS3
  Top 0.406: IC7.12 79.92,64.89 79.05,65.77 SV7.3
/CS4
  Top 0.406: IC9.12 53.91,64.89 53.05,65.77 SV9.3
/CS5
  Top 0.406: IC11.12 27.91,64.89 27.05,65.77 SV11.3
/CS6
  Top 0.406: IC13.12 4.46,23.89 3.58,24.77 SV13.3
/CS7
  Top 0.406: IC15.12 4.46,64.89 3.58,65.77 SV14.3
/RES
  Top 0.406: IC2.P$4 95.56,18.73 95.56,20.32 95.24,20.64 91.75,20.64 90.55,19.45 89.6,19.45 88.41,20.64 84.6,24.45 83.17,24.45 82.12,25.5 IC1.10
/RES1
  Top 0.406: IC4.P$4 69.56,18.73 69.56,20.32 69.24,20.64 65.75,20.64 64.55,19.45 63.6,19.45 62.41,20.64 58.6,24.45 57.17,24.45 56.12,25.5 IC3.10
/RES2
  Top 0.406: IC6.P$4 43.55,18.73 43.55,20.32 43.24,20.64 39.74,20.64 38.55,19.45 37.6,19.45 36.41,20.64 32.6,24.45 31.17,24.45 30.12,25.5 IC5.10
/RES3
  Top 0.406: IC8.P$4 95.56,59.73 95.56,61.32 95.24,61.64 91.75,61.64 90.55,60.45 89.6,60.45 88.41,61.64 84.6,65.45 83.17,65.45 82.12,66.5 IC7.10
/RES4
  Top 0.406: IC10.P$4 69.56,59.73 69.56,61.32 69.24,61.64 65.75,61.64 64.55,60.45 63.6,60.45 62.41,61.64 58.6,65.45 57.17,65.45 56.12,66.5 IC9.10
/RES5
  Top 0.406: IC12.P$4 43.55,59.73 43.55,61.32 43.24,61.64 39.74,61.64 38.55,60.45 37.6,60.45 36.41,61.64 32.6,65.45 31.17,65.45 30.12,66.5 IC11.10
/RES6  (via drill 0.7)
  Top 0.406: IC13.10 6.67,25.5 8.35,23.81 9.78,23.81 12.95,20.64 14.14,19.45 14.22,19.37 v15.33,19.37
  Top 0.61: v20.41,16.51 IC14.P$4
  Bottom 0.61: v20.41,16.51 17.55,19.37 v15.33,19.37
/RES7  (via drill 0.7)
  Top 0.406: IC15.10 6.67,66.5 8.35,64.81 9.78,64.81 12.95,61.64 14.14,60.45 14.22,60.37 v15.33,60.37
  Top 0.61: v20.41,57.51 IC16.P$4
  Bottom 0.61: v20.41,57.51 17.55,60.37 v15.33,60.37
GND  (via drill 0.7)
  Top 0.406: IC1.19 84.19,18.8 83.17,17.78 82.86,17.78 | IC1.5 84.77,27.8 84.6,27.62 84.43,27.8 IC1.6 | C5.2 v95.08,29.37 | IC1.18 83.39,18.48 82.7,17.78
  Top 0.61: IC2.P$2 93.65,14.29 94.6,13.34 C1.2 v95.87,13.34 | LED1.C 85.71,35.24 86.98,36.51 JP2.1 89.84,36.51 90.47,37.15 C4.2
  Top 0.813: 82.86,17.78 82.7,17.78 v82.22,17.78 | C9.2 84.6,30.8 84.55,30.74 C10.2 84.6,29.53 84.6,27.62 v84.6,26.35 | C8.2 v86.98,13.02 | C7.2 v88.57,13.02
  other vias: 86.98,24.45 91.27,15.24
  pour Bottom (isolate 0.305): 75.87,0 75.87,39.37 100,39.37 100,0
  pour Top (isolate 0.305): 75.87,0 75.87,39.37 100,39.37 100,0
GND1  (via drill 0.7)
  Top 0.406: IC3.19 58.2,18.8 57.17,17.78 56.85,17.78 | IC3.5 58.77,27.8 58.6,27.62 58.43,27.8 IC3.6 | C14.2 v69.08,29.37 | IC3.18 57.4,18.48 56.7,17.78
  Top 0.61: IC4.P$2 67.65,14.29 68.6,13.34 C6.2 v69.87,13.34 | LED2.C 59.71,35.24 60.98,36.51 JP4.1 63.84,36.51 64.47,37.15 C13.2
  Top 0.813: 56.85,17.78 56.7,17.78 v56.22,17.78 | C15.2 58.6,30.8 58.55,30.74 C16.2 58.6,29.53 58.6,27.62 v58.6,26.35 | C11.2 v60.98,13.02 | C12.2 v62.57,13.02
  other vias: 60.98,24.45 65.27,15.24
  pour Bottom (isolate 0.305): 49.87,0 49.87,39.37 74,39.37 74,0
  pour Top (isolate 0.305): 49.87,0 49.87,39.37 74,39.37 74,0
GND2  (via drill 0.7)
  Top 0.406: IC5.19 32.2,18.8 31.17,17.78 30.86,17.78 | IC5.5 32.77,27.8 32.6,27.62 32.43,27.8 IC5.6 | C22.2 v43.08,29.37 | IC5.18 31.39,18.48 30.7,17.78
  Top 0.61: IC6.P$2 41.65,14.29 42.6,13.34 C18.2 v43.87,13.34 | LED3.C 33.71,35.24 34.98,36.51 JP6.1 37.84,36.51 38.48,37.15 C21.2
  Top 0.813: 30.86,17.78 30.7,17.78 v30.22,17.78 | C23.2 32.6,30.8 32.55,30.74 C24.2 32.6,29.53 32.6,27.62 v32.6,26.35 | C19.2 v34.98,13.02 | C20.2 v36.57,13.02
  other vias: 34.98,24.45 39.27,15.24
  pour Bottom (isolate 0.305): 23.87,0 23.87,39.37 48,39.37 48,0
  pour Top (isolate 0.305): 23.87,0 23.87,39.37 48,39.37 48,0
GND3  (via drill 0.7)
  Top 0.406: IC7.19 84.19,59.8 83.17,58.78 82.86,58.78 | IC7.5 84.77,68.8 84.6,68.62 84.43,68.8 IC7.6 | C30.2 v95.08,70.37 | IC7.18 83.39,59.48 82.7,58.78
  Top 0.61: IC8.P$2 93.65,55.29 94.6,54.34 C26.2 v95.87,54.34 | LED4.C 85.71,76.24 86.98,77.51 JP8.1 89.84,77.51 90.47,78.15 C29.2
  Top 0.813: 82.86,58.78 82.7,58.78 v82.22,58.78 | C31.2 84.6,71.8 84.55,71.74 C32.2 84.6,70.53 84.6,68.62 v84.6,67.35 | C27.2 v86.98,54.02 | C28.2 v88.57,54.02
  other vias: 86.98,65.45 91.27,56.24
  pour Bottom (isolate 0.305): 75.87,41 75.87,80.37 100,80.37 100,41
  pour Top (isolate 0.305): 75.87,41 75.87,80.37 100,80.37 100,41
GND4  (via drill 0.7)
  Top 0.406: IC9.19 58.2,59.8 57.17,58.78 56.85,58.78 | IC9.5 58.77,68.8 58.6,68.62 58.43,68.8 IC9.6 | C38.2 v69.08,70.37 | IC9.18 57.4,59.48 56.7,58.78
  Top 0.61: IC10.P$2 67.65,55.29 68.6,54.34 C34.2 v69.87,54.34 | LED5.C 59.71,76.24 60.98,77.51 JP10.1 63.84,77.51 64.47,78.15 C37.2
  Top 0.813: 56.85,58.78 56.7,58.78 v56.22,58.78 | C39.2 58.6,71.8 58.55,71.74 C40.2 58.6,70.53 58.6,68.62 v58.6,67.35 | C35.2 v60.98,54.02 | C36.2 v62.57,54.02
  other vias: 60.98,65.45 65.27,56.24
  pour Bottom (isolate 0.305): 49.87,41 49.87,80.37 74,80.37 74,41
  pour Top (isolate 0.305): 49.87,41 49.87,80.37 74,80.37 74,41
GND5  (via drill 0.7)
  Top 0.406: IC11.19 32.2,59.8 31.17,58.78 30.86,58.78 | IC11.5 32.77,68.8 32.6,68.62 32.43,68.8 IC11.6 | C46.2 v43.08,70.37 | IC11.18 31.39,59.48 30.7,58.78
  Top 0.61: IC12.P$2 41.65,55.29 42.6,54.34 C42.2 v43.87,54.34 | LED6.C 33.71,76.24 34.98,77.51 JP12.1 37.84,77.51 38.48,78.15 C45.2
  Top 0.813: 30.86,58.78 30.7,58.78 v30.22,58.78 | C47.2 32.6,71.8 32.55,71.74 C48.2 32.6,70.53 32.6,68.62 v32.6,67.35 | C43.2 v34.98,54.02 | C44.2 v36.57,54.02
  other vias: 34.98,65.45 39.27,56.24
  pour Bottom (isolate 0.305): 23.87,41 23.87,80.37 48,80.37 48,41
  pour Top (isolate 0.305): 23.87,41 23.87,80.37 48,80.37 48,41
GND6  (via drill 0.7)
  Top 0.406: IC13.19 8.73,18.8 7.71,17.78 7.39,17.78 | IC13.5 9.31,27.8 9.14,27.62 8.97,27.8 IC13.6 | IC13.18 7.93,18.48 7.24,17.78 | C54.2 15.35,36.84 v15.33,36.83
  Top 0.508: v20.41,20 C53.2
  Top 0.61: IC14.P$2 18.19,14.29 19.14,13.34 C50.2 v20.41,13.34 | LED7.C 10.25,35.24 11.52,36.51 JP14.1
  Top 0.813: 7.39,17.78 7.24,17.78 v6.76,17.78 | C55.2 9.14,30.8 9.09,30.74 C56.2 9.14,29.53 9.14,27.62 v9.14,26.35 | C51.2 v11.52,13.02 | C52.2 v13.11,13.02
  other vias: 15.97,14.61 11.52,24.13
  pour Bottom (isolate 0.305): -0.59,0 -0.59,39.37 22,39.37 22,0
  pour Top (isolate 0.305): -0.59,0 -0.59,39.37 22,39.37 22,0
GND7  (via drill 0.7)
  Top 0.406: IC15.19 8.73,59.8 7.71,58.78 7.39,58.78 | IC15.5 9.31,68.8 9.14,68.62 8.97,68.8 IC15.6 | IC15.18 7.93,59.48 7.24,58.78 | C62.2 15.35,77.84 v15.33,77.83
  Top 0.508: C61.2 v20.41,61
  Top 0.61: IC16.P$2 18.19,55.29 19.14,54.34 C58.2 v20.41,54.34 | LED8.C 10.25,76.24 11.52,77.51 JP16.1
  Top 0.813: 7.39,58.78 7.24,58.78 v6.76,58.78 | C63.2 9.14,71.8 9.09,71.74 C64.2 9.14,70.53 9.14,68.62 v9.14,67.35 | C59.2 v11.52,54.02 | C60.2 v13.11,54.02
  other vias: 15.97,55.6 11.52,65.13
  pour Bottom (isolate 0.305): -0.59,41 -0.59,80.37 22,80.37 22,41
  pour Top (isolate 0.305): -0.59,41 -0.59,80.37 22,80.37 22,41
GPI0  (via drill 0.7)
  Top 0.406: IC1.29 90.39,23.89 90.79,23.5 v91.43,23.5
  Bottom 0.406: v91.43,23.5 91.75,23.5 95.56,19.68 95.56,18.41 96.19,17.78 96.19,16.51 SV2.1
GPI1  (via drill 0.7)
  Top 0.406: IC1.30 91.36,24.7 v91.43,24.77
  Bottom 0.406: v91.43,24.77 91.75,24.77 96.19,20.32 96.19,19.05 SV2.2
GPI2  (via drill 0.7)
  Top 0.406: IC1.31 90.41,25.5 90.95,26.04 v91.43,26.04
  Bottom 0.406: v91.43,26.04 91.75,26.04 SV2.3
GPI3  (via drill 0.7)
  Top 0.406: IC1.32 89.69,26.37 90.63,27.3 v91.43,27.3
  Bottom 0.406: v91.43,27.3 91.75,27.3 96.83,22.23 SV2.4
GPI4  (via drill 0.7)
  Top 0.406: IC3.29 64.39,23.89 64.79,23.5 v65.43,23.5
  Bottom 0.406: v65.43,23.5 65.75,23.5 69.56,19.68 69.56,18.41 70.19,17.78 70.19,16.51 SV4.1
GPI5  (via drill 0.7)
  Top 0.406: IC3.30 65.36,24.7 v65.43,24.77
  Bottom 0.406: v65.43,24.77 65.75,24.77 70.19,20.32 70.19,19.05 SV4.2
GPI6  (via drill 0.7)
  Top 0.406: IC3.31 64.41,25.5 64.95,26.04 v65.43,26.04
  Bottom 0.406: v65.43,26.04 65.75,26.04 SV4.3
GPI7  (via drill 0.7)
  Top 0.406: IC3.32 63.7,26.37 64.63,27.3 v65.43,27.3
  Bottom 0.406: v65.43,27.3 65.75,27.3 70.83,22.23 SV4.4
GPI8  (via drill 0.7)
  Top 0.406: IC5.29 38.39,23.89 38.79,23.5 v39.43,23.5
  Bottom 0.406: v39.43,23.5 39.74,23.5 43.55,19.68 43.55,18.41 44.19,17.78 44.19,16.51 SV6.1
GPI9  (via drill 0.7)
  Top 0.406: IC5.30 39.36,24.7 v39.43,24.77
  Bottom 0.406: v39.43,24.77 39.74,24.77 44.19,20.32 44.19,19.05 SV6.2
GPI10  (via drill 0.7)
  Top 0.406: IC5.31 38.41,25.5 38.95,26.04 v39.43,26.04
  Bottom 0.406: v39.43,26.04 39.74,26.04 SV6.3
GPI11  (via drill 0.7)
  Top 0.406: IC5.32 37.7,26.37 38.63,27.3 v39.43,27.3
  Bottom 0.406: v39.43,27.3 39.74,27.3 44.83,22.23 SV6.4
GPI12  (via drill 0.7)
  Top 0.406: IC7.29 90.39,64.89 90.79,64.5 v91.43,64.5
  Bottom 0.406: v91.43,64.5 91.75,64.5 95.56,60.69 95.56,59.41 96.19,58.78 96.19,57.51 SV8.1
GPI13  (via drill 0.7)
  Top 0.406: IC7.30 91.36,65.69 v91.43,65.77
  Bottom 0.406: v91.43,65.77 91.75,65.77 96.19,61.32 96.19,60.05 SV8.2
GPI14  (via drill 0.7)
  Top 0.406: IC7.31 90.41,66.5 90.95,67.03 v91.43,67.03
  Bottom 0.406: v91.43,67.03 91.75,67.03 SV8.3
GPI15  (via drill 0.7)
  Top 0.406: IC7.32 89.69,67.37 90.63,68.31 v91.43,68.31
  Bottom 0.406: v91.43,68.31 91.75,68.31 96.83,63.23 SV8.4
GPI16  (via drill 0.7)
  Top 0.406: IC9.29 64.39,64.89 64.79,64.5 v65.43,64.5
  Bottom 0.406: v65.43,64.5 65.75,64.5 69.56,60.69 69.56,59.41 70.19,58.78 70.19,57.51 SV10.1
GPI17  (via drill 0.7)
  Top 0.406: IC9.30 65.36,65.69 v65.43,65.77
  Bottom 0.406: v65.43,65.77 65.75,65.77 70.19,61.32 70.19,60.05 SV10.2
GPI18  (via drill 0.7)
  Top 0.406: IC9.31 64.41,66.5 64.95,67.03 v65.43,67.03
  Bottom 0.406: v65.43,67.03 65.75,67.03 SV10.3
GPI19  (via drill 0.7)
  Top 0.406: IC9.32 63.7,67.37 64.63,68.31 v65.43,68.31
  Bottom 0.406: v65.43,68.31 65.75,68.31 70.83,63.23 SV10.4
GPI20  (via drill 0.7)
  Top 0.406: IC11.29 38.39,64.89 38.79,64.5 v39.43,64.5
  Bottom 0.406: v39.43,64.5 39.74,64.5 43.55,60.69 43.55,59.41 44.19,58.78 44.19,57.51 SV12.1
GPI21  (via drill 0.7)
  Top 0.406: IC11.30 39.36,65.69 v39.43,65.77
  Bottom 0.406: v39.43,65.77 39.74,65.77 44.19,61.32 44.19,60.05 SV12.2
GPI22  (via drill 0.7)
  Top 0.406: IC11.31 38.41,66.5 38.95,67.03 v39.43,67.03
  Bottom 0.406: v39.43,67.03 39.74,67.03 SV12.3
GPI23  (via drill 0.7)
  Top 0.406: IC11.32 37.7,67.37 38.63,68.31 v39.43,68.31
  Bottom 0.406: v39.43,68.31 39.74,68.31 44.83,63.23 SV12.4
GPO0  (via drill 0.7)
  Top 0.406: IC1.1 89.85,27.8 90.63,28.57 v91.43,28.57
  Bottom 0.406: v91.43,28.57 91.75,28.57 95.56,24.77 SV2.5
GPO1  (via drill 0.7)
  Top 0.406: IC1.2 87.39,28.67 87.94,29.21 90.16,29.21 90.79,29.84 v91.43,29.84
  Bottom 0.406: v91.43,29.84 91.75,29.84 94.28,27.3 SV2.6
GPO2
  Top 0.406: SV2.7 97.06,30.32 95.79,31.59 95.79,36.59 94.28,38.26 84.92,38.26 83.81,37.15 83.81,33.1 83.57,32.86 83.57,28.65 83.39,28.48 IC1.7
GPO3  (via drill 0.7)
  Top 0.406: IC1.8 82.59,29.15 v82.54,29.21
  Bottom 0.406: SV2.8 97.46,32.38 97.14,32.7 87.46,32.7 83.97,29.21 v82.54,29.21
GPO4  (via drill 0.7)
  Top 0.406: IC3.1 63.85,27.8 64.63,28.57 v65.43,28.57
  Bottom 0.406: v65.43,28.57 65.75,28.57 69.56,24.77 SV4.5
GPO5  (via drill 0.7)
  Top 0.406: IC3.2 61.4,28.67 61.94,29.21 64.16,29.21 64.79,29.84 v65.43,29.84
  Bottom 0.406: v65.43,29.84 65.75,29.84 68.28,27.3 SV4.6
GPO6
  Top 0.406: SV4.7 71.06,30.32 69.79,31.59 69.79,36.59 68.28,38.26 58.92,38.26 57.81,37.15 57.81,33.1 57.57,32.86 57.57,28.65 57.4,28.48 IC3.7
GPO7  (via drill 0.7)
  Top 0.406: IC3.8 56.59,29.15 v56.54,29.21
  Bottom 0.406: SV4.8 71.46,32.38 71.14,32.7 61.46,32.7 57.97,29.21 v56.54,29.21
GPO8  (via drill 0.7)
  Top 0.406: IC5.1 37.85,27.8 38.63,28.57 v39.43,28.57
  Bottom 0.406: v39.43,28.57 39.74,28.57 43.55,24.77 SV6.5
GPO9  (via drill 0.7)
  Top 0.406: IC5.2 35.4,28.67 35.94,29.21 38.16,29.21 38.79,29.84 v39.43,29.84
  Bottom 0.406: v39.43,29.84 39.74,29.84 42.28,27.3 SV6.6
GPO10
  Top 0.406: SV6.7 45.06,30.32 43.79,31.59 43.79,36.59 42.28,38.26 32.92,38.26 31.81,37.15 31.81,33.1 31.57,32.86 31.57,28.65 31.39,28.48 IC5.7
GPO11  (via drill 0.7)
  Top 0.406: IC5.8 30.59,29.15 v30.54,29.21
  Bottom 0.406: SV6.8 45.46,32.38 45.14,32.7 35.46,32.7 31.97,29.21 v30.54,29.21
GPO12  (via drill 0.7)
  Top 0.406: IC7.1 89.85,68.8 90.63,69.58 v91.43,69.58
  Bottom 0.406: v91.43,69.58 91.75,69.58 95.56,65.77 SV8.5
GPO13  (via drill 0.7)
  Top 0.406: IC7.2 87.39,69.67 87.94,70.21 90.16,70.21 90.79,70.84 v91.43,70.84
  Bottom 0.406: v91.43,70.84 91.75,70.84 94.28,68.31 SV8.6
GPO14
  Top 0.406: SV8.7 97.06,71.32 95.79,72.59 95.79,77.59 94.28,79.26 84.92,79.26 83.81,78.15 83.81,74.1 83.57,73.86 83.57,69.65 83.39,69.48 IC7.7
GPO15  (via drill 0.7)
  Top 0.406: IC7.8 82.59,70.15 v82.54,70.21
  Bottom 0.406: SV8.8 97.46,73.39 97.14,73.7 87.46,73.7 83.97,70.21 v82.54,70.21
GPO16  (via drill 0.7)
  Top 0.406: IC9.1 63.85,68.8 64.63,69.58 v65.43,69.58
  Bottom 0.406: v65.43,69.58 65.75,69.58 69.56,65.77 SV10.5
GPO17  (via drill 0.7)
  Top 0.406: IC9.2 61.4,69.67 61.94,70.21 64.16,70.21 64.79,70.84 v65.43,70.84
  Bottom 0.406: v65.43,70.84 65.75,70.84 68.28,68.31 SV10.6
GPO18
  Top 0.406: SV10.7 71.06,71.32 69.79,72.59 69.79,77.59 68.28,79.26 58.92,79.26 57.81,78.15 57.81,74.1 57.57,73.86 57.57,69.65 57.4,69.48 IC9.7
GPO19  (via drill 0.7)
  Top 0.406: IC9.8 56.59,70.15 v56.54,70.21
  Bottom 0.406: SV10.8 71.46,73.39 71.14,73.7 61.46,73.7 57.97,70.21 v56.54,70.21
GPO20  (via drill 0.7)
  Top 0.406: IC11.1 37.85,68.8 38.63,69.58 v39.43,69.58
  Bottom 0.406: v39.43,69.58 39.74,69.58 43.55,65.77 SV12.5
GPO21  (via drill 0.7)
  Top 0.406: IC11.2 35.4,69.67 35.94,70.21 38.16,70.21 38.79,70.84 v39.43,70.84
  Bottom 0.406: v39.43,70.84 39.74,70.84 42.28,68.31 SV12.6
GPO22
  Top 0.406: SV12.7 45.06,71.32 43.79,72.59 43.79,77.59 42.28,79.26 32.92,79.26 31.81,78.15 31.81,74.1 31.57,73.86 31.57,69.65 31.39,69.48 IC11.7
GPO23  (via drill 0.7)
  Top 0.406: IC11.8 30.59,70.15 v30.54,70.21
  Bottom 0.406: SV12.8 45.46,73.39 45.14,73.7 35.46,73.7 31.97,70.21 v30.54,70.21
GPX  (via drill 0.7)
  Top 0.406: IC1.15 82.12,21.5 82.86,22.23 v82.86,22.86
  Bottom 0.406: SV2.9 97.3,34.92 96.98,35.24 87.14,35.24 80.95,29.05 80.95,25.4 82.86,23.5 v82.86,22.86
GPX1  (via drill 0.7)
  Top 0.406: IC3.15 56.12,21.5 56.85,22.23 v56.85,22.86
  Bottom 0.406: SV4.9 71.3,34.92 70.98,35.24 61.14,35.24 54.95,29.05 54.95,25.4 56.85,23.5 v56.85,22.86
GPX2  (via drill 0.7)
  Top 0.406: IC5.15 30.12,21.5 30.86,22.23 v30.86,22.86
  Bottom 0.406: SV6.9 45.3,34.92 44.98,35.24 35.14,35.24 28.95,29.05 28.95,25.4 30.86,23.5 v30.86,22.86
GPX3  (via drill 0.7)
  Top 0.406: IC7.15 82.12,62.49 82.86,63.23 v82.86,63.86
  Bottom 0.406: SV8.9 97.3,75.92 96.98,76.24 87.14,76.24 80.95,70.05 80.95,66.4 82.86,64.5 v82.86,63.86
GPX4  (via drill 0.7)
  Top 0.406: IC9.15 56.12,62.49 56.85,63.23 v56.85,63.86
  Bottom 0.406: SV10.9 71.3,75.92 70.98,76.24 61.14,76.24 54.95,70.05 54.95,66.4 56.85,64.5 v56.85,63.86
GPX5  (via drill 0.7)
  Top 0.406: IC11.15 30.12,62.49 30.86,63.23 v30.86,63.86
  Bottom 0.406: SV12.9 45.3,75.92 44.98,76.24 35.14,76.24 28.95,70.05 28.95,66.4 30.86,64.5 v30.86,63.86
INT
  Top 0.406: IC1.17 81.73,19.2 79.68,17.14 SV1.6
INT1
  Top 0.406: IC3.17 55.73,19.2 53.68,17.14 SV3.6
INT2
  Top 0.406: IC5.17 29.73,19.2 27.68,17.14 SV5.6
INT3
  Top 0.406: IC7.17 81.73,60.2 79.68,58.15 SV7.6
INT4
  Top 0.406: IC9.17 55.73,60.2 53.68,58.15 SV9.6
INT5
  Top 0.406: IC11.17 29.73,60.2 27.68,58.15 SV11.6
INT6
  Top 0.406: IC13.17 6.27,19.2 4.22,17.14 SV13.6
INT7
  Top 0.406: IC15.17 6.27,60.2 4.22,58.15 SV14.6
MISO
  Top 0.406: IC1.13 80.07,23.09 79.2,22.23 SV1.4
MISO1
  Top 0.406: IC3.13 54.07,23.09 53.2,22.23 SV3.4
MISO2
  Top 0.406: IC5.13 28.07,23.09 27.2,22.23 SV5.4
MISO3
  Top 0.406: IC7.13 80.07,64.09 79.2,63.23 SV7.4
MISO4
  Top 0.406: IC9.13 54.07,64.09 53.2,63.23 SV9.4
MISO5
  Top 0.406: IC11.13 28.07,64.09 27.2,63.23 SV11.4
MISO6
  Top 0.406: IC13.13 4.61,23.09 3.74,22.23 SV13.4
MISO7
  Top 0.406: IC15.13 4.61,64.09 3.74,63.23 SV14.4
MOSI
  Top 0.406: IC1.14 80.39,22.3 80,21.91 80,20.95 78.73,19.68 SV1.5
MOSI1
  Top 0.406: IC3.14 54.38,22.3 54,21.91 54,20.95 52.73,19.68 SV3.5
MOSI2
  Top 0.406: IC5.14 28.39,22.3 28,21.91 28,20.95 26.73,19.68 SV5.5
MOSI3
  Top 0.406: IC7.14 80.39,63.3 80,62.91 80,61.95 78.73,60.69 SV7.5
MOSI4
  Top 0.406: IC9.14 54.38,63.3 54,62.91 54,61.95 52.73,60.69 SV9.5
MOSI5
  Top 0.406: IC11.14 28.39,63.3 28,62.91 28,61.95 26.73,60.69 SV11.5
MOSI6
  Top 0.406: IC13.14 4.92,22.3 4.54,21.91 4.54,20.95 3.27,19.68 SV13.5
MOSI7
  Top 0.406: IC15.14 4.92,63.3 4.54,62.91 4.54,61.95 3.27,60.69 SV14.5
N$1
  Top 0.61: C2.2 94.5,19.58 93.65,18.73 IC2.P$5
N$2
  Top 0.61: C3.2 68.5,19.58 67.65,18.73 IC4.P$5
N$3
  Top 0.61: IC2.P$1 92.7,13.34 C1.1 92.8,12.91 94.92,10.79 JP1.2
N$4
  Top 0.406: R2.2 82.54,16.19 85,18.65 IC1.20
N$5
  Top 0.61: IC4.P$1 66.7,13.34 C6.1 66.8,12.91 68.92,10.79 JP3.2
N$6
  Top 0.61: LED1.A 85.65,37.24 84.55,36.14 R3.1
N$7
  Top 0.508: R2.1 82.54,14.29 82.88,13.95 USB1.D-
N$8
  Top 0.406: IC1.21 85.8,18.5 84.12,16.83 R1.2
N$9
  Top 0.508: USB1.D+ 83.17,9.53 84.12,10.48 R1.1
N$10
  Top 0.305: 99.05,38.26 99.05,36.91 98.25,36.91 98.25,38.26 97.62,38.26
N$11
  Top 0.406: IC1.27 92.93,22.3 93.33,22.7 93.33,23.5 | Q1.1 93.33,25.24 93.33,23.5 | 93.33,23.5 93.49,23.5 94.62,22.37 C5.1
N$12
  Top 0.406: IC1.26 95.78,21.5 96.03,21.75 96.03,29.84 93.33,32.54 93.33,34.92 Q1.2 93.33,36.2 92.38,37.15 C4.1 91.75,37.15
N$13
  Bottom 0.305: 99.21,37.7 99.13,37.54 arc-127 98.49,37.54 arc0 98.33,37.86 arc111 97.78,37.94 arc18 97.62,37.7
N$14
  Top 0.61: LED2.A 59.65,37.24 58.55,36.14 R4.1
N$15
  Top 0.406: R6.2 56.54,16.19 58.99,18.65 IC3.20
N$16
  Top 0.508: R6.1 56.54,14.29 56.88,13.95 USB2.D-
N$17
  Top 0.406: IC3.21 59.8,18.5 58.12,16.83 R5.2
N$18
  Top 0.508: USB2.D+ 57.17,9.53 58.12,10.48 R5.1
N$19
  Top 0.406: IC3.27 66.93,22.3 67.33,22.7 67.33,23.5 | Q2.1 67.33,25.24 67.33,23.5 | 67.33,23.5 67.49,23.5 68.62,22.37 C14.1
N$20
  Top 0.406: IC3.26 69.78,21.5 70.03,21.75 70.03,29.84 67.33,32.54 67.33,34.92 Q2.2 67.33,36.2 66.38,37.15 C13.1 65.75,37.15
N$21
  Top 0.305: 73.05,38.26 73.05,36.91 72.25,36.91 72.25,38.26 71.62,38.26
N$22
  Bottom 0.305: 73.21,37.7 73.13,37.54 arc-127 72.49,37.54 arc0 72.33,37.86 arc111 71.78,37.94 arc18 71.62,37.7
N$23
  Top 0.61: C17.2 42.5,19.58 41.65,18.73 IC6.P$5
N$24
  Top 0.61: IC6.P$1 40.7,13.34 C18.1 40.8,12.91 42.92,10.79 JP5.2
N$25
  Top 0.61: LED3.A 33.65,37.24 32.55,36.14 R7.1
N$26
  Top 0.406: R9.2 30.54,16.19 32.99,18.65 IC5.20
N$27
  Top 0.508: R9.1 30.54,14.29 30.88,13.95 USB3.D-
N$28
  Top 0.406: IC5.21 33.8,18.5 32.12,16.83 R8.2
N$29
  Top 0.508: USB3.D+ 31.17,9.53 32.12,10.48 R8.1
N$30
  Top 0.406: IC5.27 40.93,22.3 41.33,22.7 41.33,23.5 | 41.33,25.24 | 41.33,25.24 Q3.1 | 41.33,23.5 41.33,25.24 | 41.33,23.5 41.49,23.5 42.62,22.37 C22.1
N$31
  Top 0.406: IC5.26 43.78,21.5 44.03,21.75 44.03,29.84 41.33,32.54 41.33,34.92 | 41.33,34.92 | 41.33,34.92 Q3.2 41.33,36.2 40.38,37.15 C21.1 39.74,37.15
N$32
  Top 0.305: 47.05,38.26 47.05,36.91 46.25,36.91 46.25,38.26 45.62,38.26
N$33
  Bottom 0.305: 47.21,37.7 47.13,37.54 arc-127 46.49,37.54 arc0 46.33,37.86 arc111 45.78,37.94 arc18 45.62,37.7
N$34
  Top 0.61: C25.2 94.5,60.58 93.65,59.73 IC8.P$5
N$35
  Top 0.61: IC8.P$1 92.7,54.34 C26.1 92.8,53.91 94.92,51.8 JP7.2
N$36
  Top 0.61: LED4.A 85.65,78.25 84.55,77.14 R10.1
N$37
  Top 0.406: R12.2 82.54,57.19 85,59.65 IC7.20
N$38
  Top 0.508: R12.1 82.54,55.29 82.88,54.95 USB4.D-
N$39
  Top 0.406: IC7.21 85.8,59.5 84.12,57.83 R11.2
N$40
  Top 0.508: USB4.D+ 83.17,50.52 84.12,51.48 R11.1
N$41
  Top 0.406: IC7.27 92.93,63.3 93.33,63.7 93.33,64.5 | Q4.1 93.33,66.24 93.33,64.5 | 93.33,64.5 93.49,64.5 94.62,63.37 C30.1
N$42
  Top 0.406: IC7.26 95.78,62.49 96.03,62.75 96.03,70.84 93.33,73.54 93.33,75.92 Q4.2 93.33,77.19 92.38,78.15 C29.1 91.75,78.15
N$43
  Top 0.305: 99.05,79.26 99.05,77.91 98.25,77.91 98.25,79.26 97.62,79.26
N$44
  Bottom 0.305: 99.21,78.7 99.13,78.54 arc-127 98.49,78.54 arc0 98.33,78.86 arc111 97.78,78.94 arc18 97.62,78.7
N$45
  Top 0.61: C33.2 68.5,60.58 67.65,59.73 IC10.P$5
N$46
  Top 0.61: IC10.P$1 66.7,54.34 C34.1 66.8,53.91 68.92,51.8 JP9.2
N$47
  Top 0.61: LED5.A 59.65,78.25 58.55,77.14 R13.1
N$48
  Top 0.406: R15.2 56.54,57.19 58.99,59.65 IC9.20
N$49
  Top 0.508: R15.1 56.54,55.29 56.88,54.95 USB5.D-
N$50
  Top 0.406: IC9.21 59.8,59.5 58.12,57.83 R14.2
N$51
  Top 0.508: USB5.D+ 57.17,50.52 58.12,51.48 R14.1
N$52
  Top 0.406: IC9.27 66.93,63.3 67.33,63.7 67.33,64.5 | Q5.1 67.33,66.24 67.33,64.5 | 67.33,64.5 67.49,64.5 68.62,63.37 C38.1
N$53
  Top 0.406: IC9.26 69.78,62.49 70.03,62.75 70.03,70.84 67.33,73.54 67.33,75.92 Q5.2 67.33,77.19 66.38,78.15 C37.1 65.75,78.15
N$54
  Top 0.305: 73.05,79.26 73.05,77.91 72.25,77.91 72.25,79.26 71.62,79.26
N$55
  Bottom 0.305: 73.21,78.7 73.13,78.54 arc-127 72.49,78.54 arc0 72.33,78.86 arc111 71.78,78.94 arc18 71.62,78.7
N$56
  Top 0.61: C41.2 42.5,60.58 41.65,59.73 IC12.P$5
N$57
  Top 0.61: IC12.P$1 40.7,54.34 C42.1 40.8,53.91 42.92,51.8 JP11.2
N$58
  Top 0.61: LED6.A 33.65,78.25 32.55,77.14 R16.1
N$59
  Top 0.406: R18.2 30.54,57.19 32.99,59.65 IC11.20
N$60
  Top 0.508: R18.1 30.54,55.29 30.88,54.95 USB6.D-
N$61
  Top 0.406: IC11.21 33.8,59.5 32.12,57.83 R17.2
N$62
  Top 0.508: USB6.D+ 31.17,50.52 32.12,51.48 R17.1
N$63
  Top 0.406: IC11.27 40.93,63.3 41.33,63.7 41.33,64.5 | 41.33,66.24 | 41.33,66.24 Q6.1 | 41.33,64.5 41.33,66.24 | 41.33,64.5 41.49,64.5 42.62,63.37 C46.1
N$64
  Top 0.406: IC11.26 43.78,62.49 44.03,62.75 44.03,70.84 41.33,73.54 41.33,75.92 | 41.33,75.92 | 41.33,75.92 Q6.2 41.33,77.19 40.38,78.15 C45.1 39.74,78.15
N$65
  Top 0.305: 47.05,79.26 47.05,77.91 46.25,77.91 46.25,79.26 45.62,79.26
N$66
  Bottom 0.305: 47.21,78.7 47.13,78.54 arc-127 46.49,78.54 arc0 46.33,78.86 arc111 45.78,78.94 arc18 45.62,78.7
N$67
  Top 0.61: C49.2 19.04,19.58 18.19,18.73 IC14.P$5
N$68
  Top 0.61: 17.24,13.34 IC14.P$1
  Top 0.813: JP13.2 20.41,7.62 21.05,8.26 21.05,11.11 20.09,12.06 17.55,12.06 17.24,12.38 17.24,13.34 C50.1
N$69
  Top 0.61: LED7.A 10.19,37.24 9.09,36.14 R19.1
N$70
  Top 0.406: R21.2 7.08,16.19 9.54,18.65 IC13.20
N$71
  Top 0.508: R21.1 7.08,14.29 7.42,13.95 USB7.D-
N$72
  Top 0.406: IC13.21 10.34,18.5 8.66,16.83 R20.2
N$73
  Top 0.508: USB7.D+ 7.71,9.53 8.66,10.48 R20.1
N$74
  Top 0.406: IC13.27 16.36,22.3 16.92,22.86 16.92,30.48 18.51,32.07 18.51,33.66 | C54.1 18.2,35.55 18.51,35.24 18.51,33.66 | 18.51,33.66 Q7.1
N$75
  Top 0.406: IC13.26 17.46,21.5 18.51,22.54 18.51,22.86 | Q7.2 18.51,24.13 18.51,22.86 | C53.1 18.97,22.4 18.51,22.86
N$76
  Top 0.305: 21.05,38.26 21.05,36.91 20.25,36.91 20.25,38.26 19.62,38.26
N$77
  Bottom 0.305: 21.21,37.7 21.13,37.54 arc-127 20.49,37.54 arc0 20.33,37.86 arc111 19.78,37.94 arc18 19.62,37.7
N$78
  Top 0.61: C57.2 19.04,60.58 18.19,59.73 IC16.P$5
N$79
  Top 0.61: 17.24,54.34 IC16.P$1
  Top 0.813: JP15.2 20.41,48.62 21.05,49.26 21.05,52.11 20.09,53.06 17.55,53.06 17.24,53.38 17.24,54.34 C58.1
N$80
  Top 0.61: LED8.A 10.19,78.25 9.09,77.14 R22.1
N$81
  Top 0.406: R24.2 7.08,57.19 9.54,59.65 IC15.20
N$82
  Top 0.508: R24.1 7.08,55.29 7.42,54.95 USB8.D-
N$83
  Top 0.406: IC15.21 10.34,59.5 8.66,57.83 R23.2
N$84
  Top 0.508: USB8.D+ 7.71,50.52 8.66,51.48 R23.1
N$85
  Top 0.406: IC15.27 16.36,63.3 16.92,63.86 16.92,71.48 18.51,73.07 18.51,74.66 | C62.1 18.2,76.55 18.51,76.24 18.51,74.66 | 18.51,74.66 Q8.1
N$86
  Top 0.406: IC15.26 17.46,62.49 18.51,63.54 18.51,63.86 | Q8.2 18.51,65.13 18.51,63.86 | C61.1 18.97,63.4 18.51,63.86
N$87
  Top 0.305: 21.05,79.26 21.05,77.91 20.25,77.91 20.25,79.26 19.62,79.26
N$88
  Bottom 0.305: 21.21,78.7 21.13,78.54 arc-127 20.49,78.54 arc0 20.33,78.86 arc111 19.78,78.94 arc18 19.62,78.7
SCLK
  Top 0.406: IC1.11 80.39,24.7 80,25.08 80,26.04 78.73,27.3 SV1.2
SCLK1
  Top 0.406: IC3.11 54.38,24.7 54,25.08 54,26.04 52.73,27.3 SV3.2
SCLK2
  Top 0.406: IC5.11 28.39,24.7 28,25.08 28,26.04 26.73,27.3 SV5.2
SCLK3
  Top 0.406: IC7.11 80.39,65.69 80,66.08 80,67.03 78.73,68.31 SV7.2
SCLK4
  Top 0.406: IC9.11 54.38,65.69 54,66.08 54,67.03 52.73,68.31 SV9.2
SCLK5
  Top 0.406: IC11.11 28.39,65.69 28,66.08 28,67.03 26.73,68.31 SV11.2
SCLK6
  Top 0.406: IC13.11 4.92,24.7 4.54,25.08 4.54,26.04 3.27,27.3 SV13.2
SCLK7
  Top 0.406: IC15.11 4.92,65.69 4.54,66.08 4.54,67.03 3.27,68.31 SV14.2
VBUS
  Top 0.406: IC1.24 88.4,19.2 88.57,19.37
  Top 0.813: 88.57,19.37 C7.1 89.31,16.09 89.84,15.56 89.84,11.51 | 89.84,11.51 91.35,11.51 JP1.1 | USB1.VBUS 89.84,11.51
VBUS1
  Top 0.406: IC3.24 62.4,19.2 62.57,19.37
  Top 0.813: 62.57,19.37 C12.1 63.31,16.09 63.84,15.56 63.84,11.51 | 63.84,11.51 65.35,11.51 JP3.1 | USB2.VBUS 63.84,11.51
VBUS2
  Top 0.406: IC5.24 36.4,19.2 36.57,19.37
  Top 0.813: 36.57,19.37 C20.1 37.31,16.09 37.84,15.56 37.84,11.51 | 37.84,11.51 39.35,11.51 JP5.1 | USB3.VBUS 37.84,11.51
VBUS3
  Top 0.406: IC7.24 88.4,60.2 88.57,60.37
  Top 0.813: 88.57,60.37 C28.1 89.31,57.09 89.84,56.56 89.84,52.51 | 89.84,52.51 91.35,52.51 JP7.1 | USB4.VBUS 89.84,52.51
VBUS4
  Top 0.406: IC9.24 62.4,60.2 62.57,60.37
  Top 0.813: 62.57,60.37 C36.1 63.31,57.09 63.84,56.56 63.84,52.51 | 63.84,52.51 65.35,52.51 JP9.1 | USB5.VBUS 63.84,52.51
VBUS5
  Top 0.406: IC11.24 36.4,60.2 36.57,60.37
  Top 0.813: 36.57,60.37 C44.1 37.31,57.09 37.84,56.56 37.84,52.51 | 37.84,52.51 39.35,52.51 JP11.1 | USB6.VBUS 37.84,52.51
VBUS6
  Top 0.406: IC13.24 12.94,19.2 13.11,19.37
  Top 0.813: 13.11,19.37 C52.1 13.85,16.09 14.38,15.56 14.38,11.51 | 14.38,11.51 15.57,11.51 16.92,10.16 JP13.1 | USB7.VBUS 14.38,11.51
VBUS7
  Top 0.406: IC15.24 12.94,60.2 13.11,60.37
  Top 0.813: 13.11,60.37 C60.1 13.85,57.09 14.38,56.56 14.38,52.51 | 14.38,52.51 15.57,52.51 16.92,51.16 JP15.1 | USB8.VBUS 14.38,52.51
VL
  Top 0.406: 86.02,27.8 | 86.02,27.8 86.03,27.78 | IC1.3 86.36,27.8 86.19,27.62 86.02,27.8 | 86.02,27.8 IC1.4
  Top 0.61: C10.1 86.82,29.53 87.46,30.16 89.84,30.16 90.47,30.8 90.47,32.07 JP2.2 | SV1.1 79.12,29.53 79.36,29.53 83.57,25.32 85.47,25.32 86.19,26.04 86.19,27.62
  Top 0.813: C10.1 86.19,29.53 86.19,27.62
VL1
  Top 0.406: 60.02,27.8 | 60.02,27.8 60.03,27.78 | IC3.3 60.36,27.8 60.19,27.62 60.02,27.8 | 60.02,27.8 IC3.4
  Top 0.61: C16.1 60.82,29.53 61.46,30.16 63.84,30.16 64.47,30.8 64.47,32.07 JP4.2 | SV3.1 53.12,29.53 53.36,29.53 57.57,25.32 59.47,25.32 60.19,26.04 60.19,27.62
  Top 0.813: C16.1 60.19,29.53 60.19,27.62
VL2
  Top 0.406: 34.02,27.8 | 34.02,27.8 34.03,27.78 | IC5.3 34.36,27.8 34.19,27.62 34.02,27.8 | 34.02,27.8 IC5.4
  Top 0.61: C24.1 34.82,29.53 35.46,30.16 37.84,30.16 38.48,30.8 38.48,32.07 JP6.2 | SV5.1 27.12,29.53 27.36,29.53 31.57,25.32 33.47,25.32 34.19,26.04 34.19,27.62
  Top 0.813: C24.1 34.19,29.53 34.19,27.62
VL3
  Top 0.406: 86.02,68.8 | 86.02,68.8 86.03,68.78 | IC7.3 86.36,68.8 86.19,68.62 86.02,68.8 | 86.02,68.8 IC7.4
  Top 0.61: C32.1 86.82,70.53 87.46,71.16 89.84,71.16 90.47,71.8 90.47,73.07 JP8.2 | SV7.1 79.12,70.53 79.36,70.53 83.57,66.32 85.47,66.32 86.19,67.03 86.19,68.62
  Top 0.813: C32.1 86.19,70.53 86.19,68.62
VL4
  Top 0.406: 60.02,68.8 | 60.02,68.8 60.03,68.78 | IC9.3 60.36,68.8 60.19,68.62 60.02,68.8 | 60.02,68.8 IC9.4
  Top 0.61: C40.1 60.82,70.53 61.46,71.16 63.84,71.16 64.47,71.8 64.47,73.07 JP10.2 | SV9.1 53.12,70.53 53.36,70.53 57.57,66.32 59.47,66.32 60.19,67.03 60.19,68.62
  Top 0.813: C40.1 60.19,70.53 60.19,68.62
VL5
  Top 0.406: 34.02,68.8 | 34.02,68.8 34.03,68.78 | IC11.3 34.36,68.8 34.19,68.62 34.02,68.8 | 34.02,68.8 IC11.4
  Top 0.61: C48.1 34.82,70.53 35.46,71.16 37.84,71.16 38.48,71.8 38.48,73.07 JP12.2 | SV11.1 27.12,70.53 27.36,70.53 31.57,66.32 33.47,66.32 34.19,67.03 34.19,68.62
  Top 0.813: C48.1 34.19,70.53 34.19,68.62
VL6
  Top 0.406: 10.56,27.8 | 10.56,27.8 10.57,27.78 | IC13.3 10.9,27.8 10.73,27.62 10.56,27.8 | 10.56,27.8 IC13.4
  Top 0.61: C56.1 11.36,29.53 12,30.16 14.38,30.16 15.02,30.8 15.02,32.07 JP14.2 | 10.73,27.62 10.73,26.04 9.7,25 8.43,25 3.9,29.53 3.58,29.84 SV13.1
  Top 0.813: C56.1 10.73,29.53 10.73,27.62
VL7
  Top 0.406: 10.56,68.8 | 10.56,68.8 10.57,68.78 | IC15.3 10.9,68.8 10.73,68.62 10.56,68.8 | 10.56,68.8 IC15.4
  Top 0.61: C64.1 11.36,70.53 12,71.16 14.38,71.16 15.02,71.8 15.02,73.07 JP16.2 | 10.73,68.62 10.73,67.03 9.7,66 8.43,66 3.9,70.53 3.58,70.84 SV14.1
  Top 0.813: C64.1 10.73,70.53 10.73,68.62

## Text on the board
tPlace: TOP | TOP | TOP | TOP | TOP | TOP | TOP | TOP
bPlace: BOT | BOT | BOT | BOT | BOT | BOT | BOT | BOT
bStop: INOSENS | INOSENS | INOSENS | INOSENS | INOSENS | INOSENS | INOSENS | INOSENS